# EAGLE board PLACA1_MAGO (EAGLE 9.6.2)
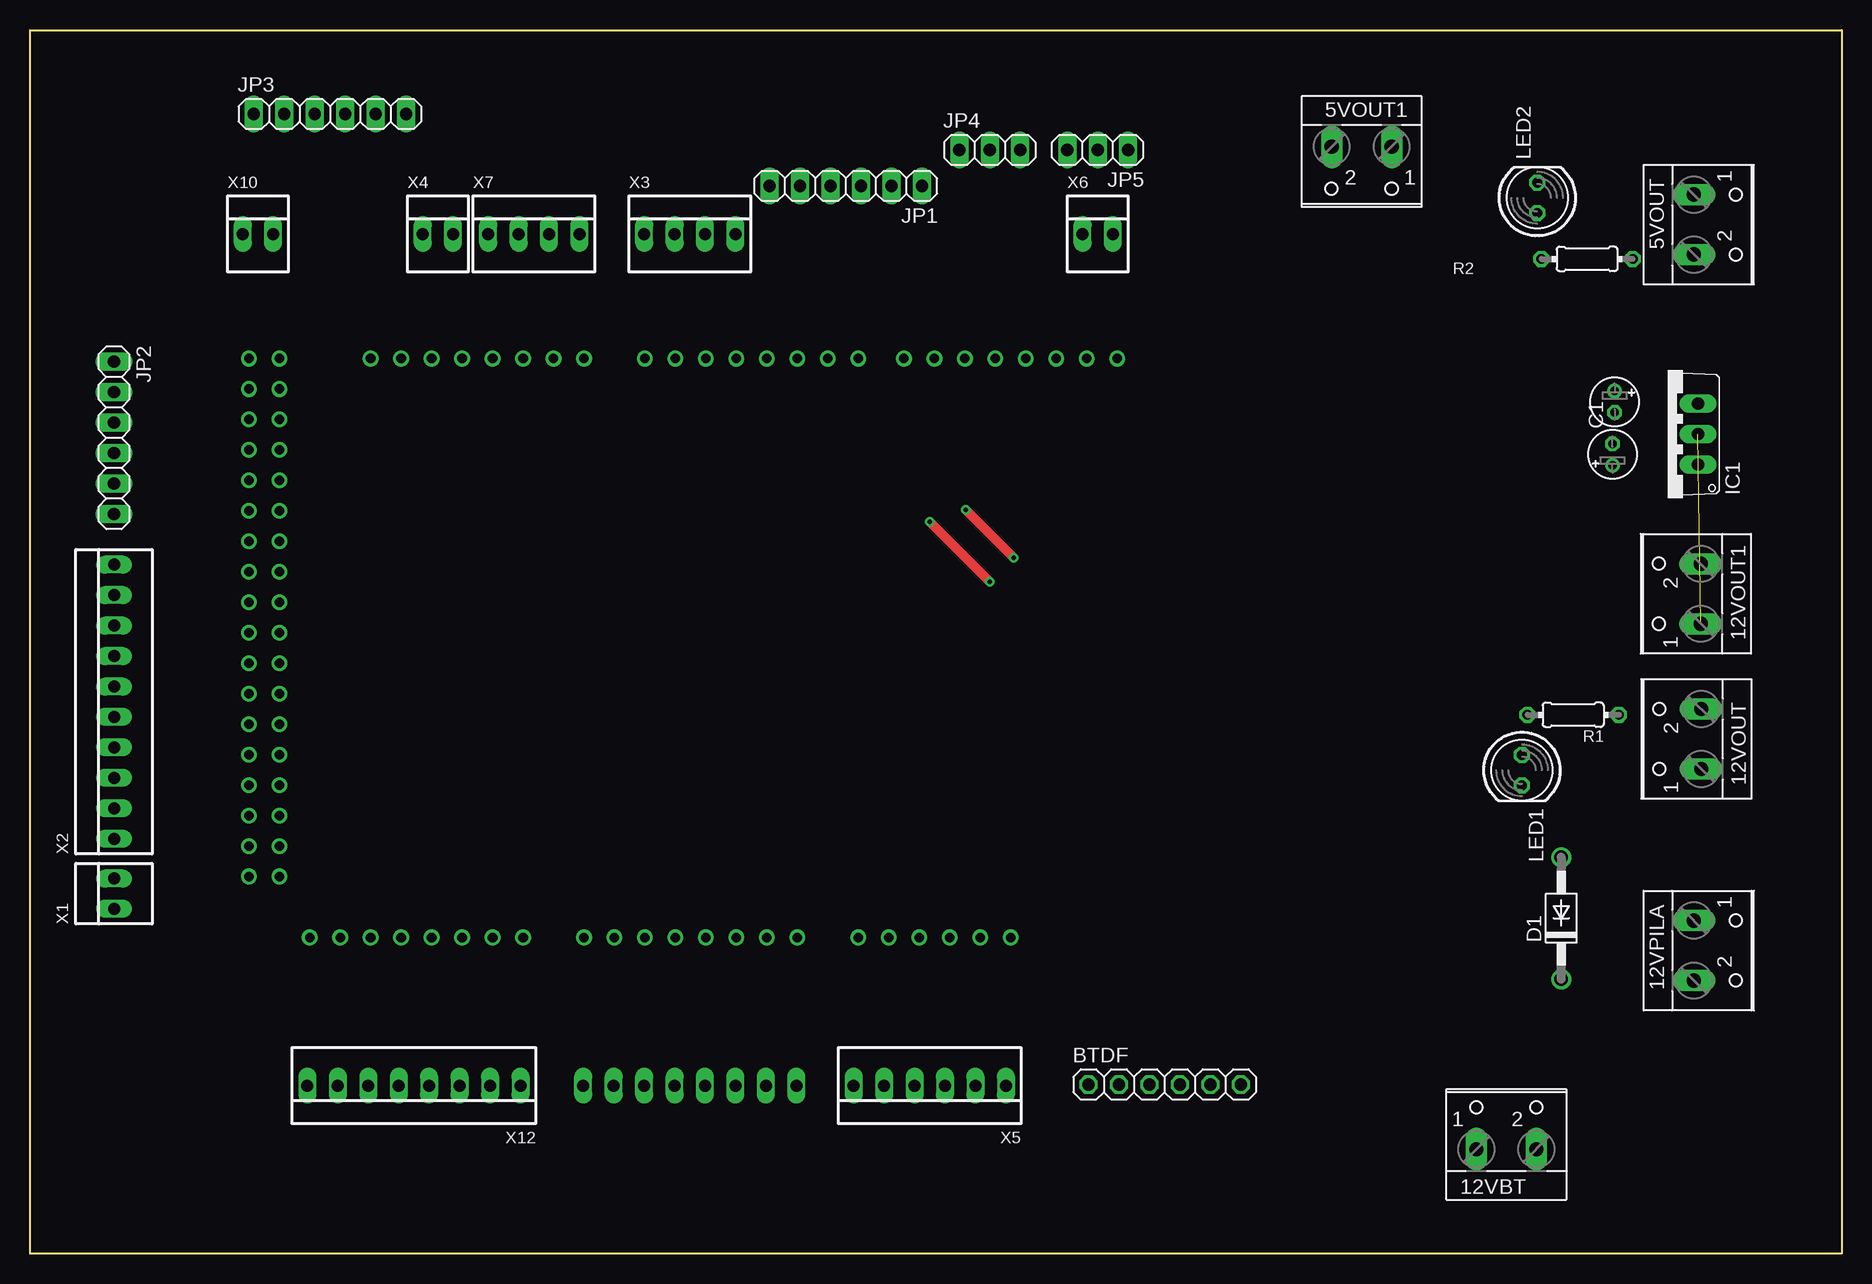
[diagram p0: board, top side]
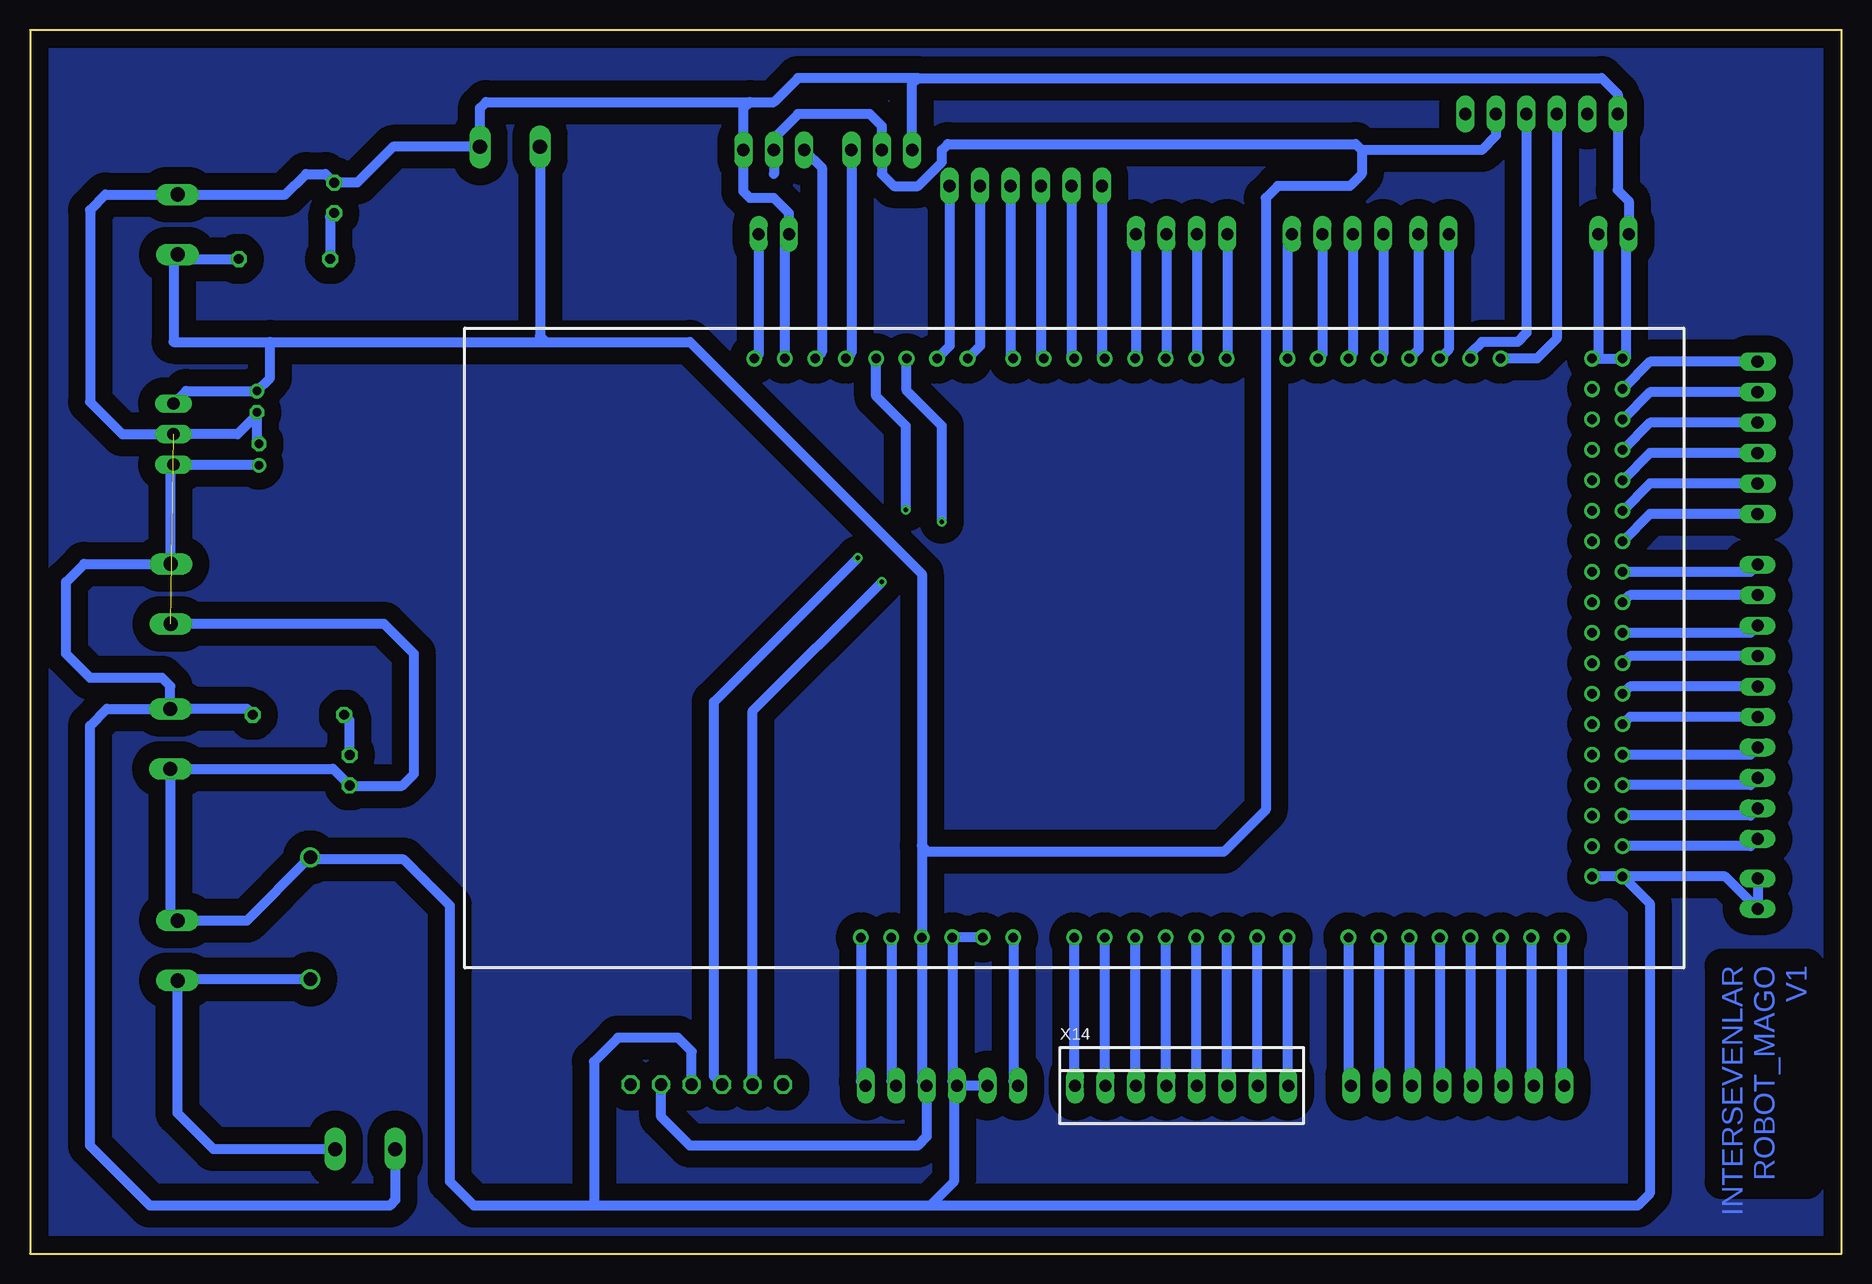
[diagram p1: board, bottom side, seen from below]

Size 151 x 102 mm. Coordinates in mm from the lower left corner, seen from the top.
Outline: 0,102 151,102 151,0 0,0 0,102
Copper layers (1*16): Top 0.035mm / dielectric 1.5mm / Bottom 0.035mm
Design rules "default": minimum track width 6mil, minimum drill 0.35mm, track to track 6mil, track to pad 6mil, pad to pad 6mil, via to via 6mil, smd to smd 6mil, copper to edge 40mil, drill to drill 6mil, minimum pad ring 10mil, minimum via ring 8mil, stop-mask expansion 4mil, vias tented up to drill 0mil, thermal gap 10mil

## Footprints (pad centres in the part's own frame; a part is rotated, then mirrored left to right if it is on the bottom)
W237-102 = drill 1.194 long: 1 -2.5,-1.27; 2 2.5,-1.27
1X06 = drill 1.016 octagon: 1 -6.35,0; 2 -3.81,0; 3 -1.27,0; 4 1.27,0; 5 3.81,0; 6 6.35,0
E1,8-4 = drill 0.711 pad 1.168: + -0.889,0 | drill 0.711 pad 1.168 octagon: - 0.889,0
DO41-10 = drill 1.118: A 5.08,0; C -5.08,0
TO220V = drill 1.016 long: 1 -2.54,-2.54; 2 0,-2.54; 3 2.54,-2.54
1X06' = drill 1.016 long: 1 -6.35,0; 2 -3.81,0; 3 -1.27,0; 4 1.27,0; 5 3.81,0; 6 6.35,0
1X03 = drill 1.016 long: 1 -2.54,0; 2 0,0; 3 2.54,0
LED5MM = drill 0.813 octagon: A -1.27,0; K 1.27,0
0204/7 = drill 0.813 octagon: 1 -3.81,0; 2 3.81,0
MEGAOUTLINE = drill 0.8: 0 12.7,24.13; 1 10.16,24.13; 2 7.62,24.13; 3 5.08,24.13; 3V3 -15.24,-24.13; 4 2.54,24.13; 5 0,24.13; 5V -12.7,-24.13; 6 -2.54,24.13; 7 -5.08,24.13; 8 -8.89,24.13; 9 -11.43,24.13; 10 -13.97,24.13; 11 -16.51,24.13; 12 -19.05,24.13; 13 -21.59,24.13; 14 17.78,24.13; 15 20.32,24.13; 16 22.86,24.13; 17 25.4,24.13; 18 27.94,24.13; 19 30.48,24.13; 20 33.02,24.13; 21 35.56,24.13; 22 43.18,21.59; 23 45.72,21.59; 24 43.18,19.05; 25 45.72,19.05; 26 43.18,16.51; 27 45.72,16.51; 28 43.18,13.97; 29 45.72,13.97; 30 43.18,11.43; 31 45.72,11.43; 32 43.18,8.89; 33 45.72,8.89; 34 43.18,6.35; 35 45.72,6.35; 36 43.18,3.81; 37 45.72,3.81; 38 43.18,1.27; 39 45.72,1.27; 40 43.18,-1.27; 41 45.72,-1.27; 42 43.18,-3.81; 43 45.72,-3.81; 44 43.18,-6.35; 45 45.72,-6.35; 46 43.18,-8.89; 47 45.72,-8.89; 48 43.18,-11.43; 49 45.72,-11.43; 50 43.18,-13.97; 51 45.72,-13.97; 52 43.18,-16.51; 53 45.72,-16.51; A0 0,-24.13; A1 2.54,-24.13; A2 5.08,-24.13; A3 7.62,-24.13; A4 10.16,-24.13; A5 12.7,-24.13; A6 15.24,-24.13; A7 17.78,-24.13; A8 22.86,-24.13; A9 25.4,-24.13; A10 27.94,-24.13; A11 30.48,-24.13; A12 33.02,-24.13; A13 35.56,-24.13; A14 38.1,-24.13; A15 40.64,-24.13; AREF -26.67,24.13; GND@1 -24.13,24.13; GND@2 -10.16,-24.13; GND@3 -7.62,-24.13; GND@4 43.18,24.13; GND@5 45.72,24.13; GND@6 43.18,-19.05; GND@7 45.72,-19.05; RESET -17.78,-24.13; VIN -5.08,-24.13
22-23-2021 = drill 1 long: 1 -1.27,0; 2 1.27,0
22-23-2101 = drill 1 long: 1 -11.43,0; 2 -8.89,0; 3 -6.35,0; 4 -3.81,0; 5 -1.27,0; 6 1.27,0; 7 3.81,0; 8 6.35,0; 9 8.89,0; 10 11.43,0
22-23-2041 = drill 1 long: 1 -3.81,0; 2 -1.27,0; 3 1.27,0; 4 3.81,0
22-23-2061 = drill 1 long: 1 -6.35,0; 2 -3.81,0; 3 -1.27,0; 4 1.27,0; 5 3.81,0; 6 6.35,0
22-23-2081 = drill 1 long: 1 -8.89,0; 2 -6.35,0; 3 -3.81,0; 4 -1.27,0; 5 1.27,0; 6 3.81,0; 7 6.35,0; 8 8.89,0

## Placement (x,y rotation side)
5VOUT  [W237-102]  139.96,85.78 270 top
5VOUT1  [W237-102]  111,91 180 top
12VBT  [W237-102]  123.06,9.96 0 top
12VOUT  [W237-102]  138.04,42.9 90 top
12VOUT1  [W237-102]  138,55 90 top
12VPILA  [W237-102]  139.96,25.26 270 top
BTDF  [1X06]  94.58,14.09 0 top
C1  [E1,8-4]  131.91,66.61 90 top
C2  [E1,8-4]  132.09,71.01 270 top
D1  1N4004  [DO41-10]  127.64,27.95 90 top
IC1  788TV  [TO220V]  136.5,68.31 90 top
JP1  [1X06']  68,89 180 top
JP2  [1X06']  7,68 270 top
JP3  [1X06']  25,95 0 top
JP4  [1X03]  80,92 0 top
JP5  [1X03]  89,92 180 top
LED1  [LED5MM]  124.36,40.29 270 top
LED2  [LED5MM]  125.64,88.01 90 top
R1  [0204/7]  128.63,44.91 180 top
R2  [0204/7]  129.79,82.91 180 top
U$1  MEGA_DEVICE  [MEGAOUTLINE]  63.96,50.48 0 bottom
X1  22-23-2021  [22-23-2021]  7,30 90 top
X2  22-23-2101  [22-23-2101]  7,46 90 top
X3  22-23-2041  [22-23-2041]  55,85 0 top
X4  22-23-2021  [22-23-2021]  34,85 0 top
X5  [22-23-2061]  75,14 180 top
X6  22-23-2021  [22-23-2021]  89,85 0 top
X7  22-23-2041  [22-23-2041]  42,85 0 top
X10  22-23-2021  [22-23-2021]  19,85 0 top
X12  22-23-2081  [22-23-2081]  32,14 180 top
X14  22-23-2081  [22-23-2081]  55,14 0 bottom

## Library data of the parts
5VOUT 5VOUT1 12VBT 12VOUT 12VOUT1 12VPILA = con-wago-500; MPN: 237-102; OC_FARNELL: unknown; OC_NEWARK: 70K9898
BTDF = adafruit
C1 C2 = rcl; SPICEPREFIX: C
D1 = diode
IC1 = linear
JP1-JP5 = pinhead
LED1 LED2 = led
R1 R2 = rcl; SPICEPREFIX: R
U$1 = ArduinoMegaOutline
X1 X4 X6 X10 = con-molex; MF: MOLEX; MPN: 22-23-2021; OC_FARNELL: 1462926; OC_NEWARK: 25C3832
X2 = con-molex; MF: MOLEX; MPN: 22-23-2101; OC_FARNELL: 1756828; OC_NEWARK: 94C0765
X3 X7 = con-molex; MF: MOLEX; MPN: 22-23-2041; OC_FARNELL: 1462920; OC_NEWARK: 38C0355
X5 = con-molex; MF: MOLEX; MPN: 22-23-2061; OC_FARNELL: 1462922; OC_NEWARK: 27C1933
X12 X14 = con-molex; MF: MOLEX; MPN: 22-23-2081; OC_FARNELL: 1756826; OC_NEWARK: 01C7592

## Nets
5V: 5VOUT1.2 5VOUT.2 BTDF.5 C2.+ IC1.3 JP3.5 JP4.2 JP5.2 R2.1 U$1.5V X5.3
12VIN: 12VBT.2 12VPILA.2 D1.C
12VON: 12VBT.1 12VOUT1.2 12VOUT.2 C1.+ IC1.1 R1.1
EN: BTDF.6
ENA: JP1.1 U$1.9
ENA2: JP2.1 U$1.23
ENB: JP1.6 U$1.4
ENB(2): JP2.6 U$1.33
GND: 5VOUT1.1 5VOUT.1 12VOUT1.1 12VOUT.1 12VPILA.1 BTDF.4 C1.- C2.- D1.A IC1.2 JP3.1 JP4.1 JP5.1 LED1.K LED2.K U$1.GND@1 U$1.GND@2 U$1.GND@3 U$1.GND@4 U$1.GND@5 U$1.GND@6 U$1.GND@7 X1.1 X1.2 X5.4 X5.5 X6.1 X10.1 X10.2
N$1: LED1.A R1.2
N$2: U$1.35 X2.10
N$3: U$1.37 X2.9
N$4: U$1.17 X7.1
N$5: LED2.A R2.2
N$6: U$1.16 X7.2
N$7: U$1.15 X7.3
N$8: U$1.14 X7.4
N$9: U$1.0 X3.1
N$10: U$1.1 X3.2
N$11: U$1.2 X3.3
N$12: U$1.3 X3.4
N$13: U$1.19 X4.1
N$14: U$1.18 X4.2
N$17: U$1.39 X2.8
N$18: JP3.2
N$19: U$1.41 X2.7
N$20: U$1.43 X2.6
N$21: U$1.45 X2.5
N$22: JP3.6
N$23: U$1.AREF X6.2
N$24: U$1.A15 X12.8
N$25: U$1.A14 X12.7
N$26: U$1.A13 X12.6
N$27: U$1.A12 X12.5
N$28: U$1.A11 X12.4
N$29: U$1.A10 X12.3
N$30: U$1.A9 X12.2
N$31: U$1.A8 X12.1
N$32: U$1.A7 X14.8
N$33: U$1.A6 X14.7
N$34: U$1.A5 X14.6
N$35: U$1.A4 X14.5
N$36: U$1.A3 X14.4
N$37: U$1.A2 X14.3
N$38: U$1.A1 X14.2
N$39: U$1.A0 X14.1
N$40: U$1.VIN X5.6
N$41: U$1.47 X2.4
N$42: U$1.49 X2.3
N$43: U$1.51 X2.2
N$44: U$1.3V3 X5.2
N$45: U$1.RESET X5.1
N$46: U$1.53 X2.1
PIN: JP5.3 U$1.13
PIN1: JP1.2 U$1.8
PIN1(2): JP2.2 U$1.25
PIN2: JP1.3 U$1.7
PIN2(2): JP2.3 U$1.27
PIN3: JP1.4 U$1.6
PIN3(2): JP2.4 U$1.29
PIN4: JP1.5 U$1.5
PIN4(2): JP2.5 U$1.31
PIN(2): JP4.3 U$1.12
RXD: BTDF.2 U$1.10
SCL: JP3.3 U$1.21
SDA: JP3.4 U$1.20
STATE: BTDF.1
TXD: BTDF.3 U$1.11

## Tracks (layer width: path | path; a pad name or v marks a point on that pad's centre or on a via)
5V
  Bottom 0.813: R2.1 138.32,82.91 5VOUT.2 139.04,82.93 139.04,76 131,76 | 131,76 108,76 | 108,76 96,76 76.66,56.66 76.66,34 | 76.66,34 U$1.5V 76.66,14.39 X5.3 76.27,9.73 77,9 96,9 98.39,11.39 BTDF.5 | 40,92 40.5,92.5 74.5,92.5 75,92 75,91 77,89 79,89 80,90 JP4.2 80,94 81,95 87,95 89,93 JP5.2 89,90 | 76.66,34 76.16,33.5 51.5,33.5 48,37 48,88 47,89 41,89 40,90 40,92 | 5VOUT1.2 108.5,76.5 108,76 | JP3.5 28.81,93.19 30,92 40,92 | IC1.3 137.99,71.9 C2.+ 131,72.99 131,76
12VIN
  Bottom 0.813: 12VBT.2 135.69,8.69 138.69,11.69 12VPILA.2 138.58,22.87 D1.C
12VON
  Bottom 0.813: 12VBT.1 120.56,4.44 121,4 141,4 146,9 146,44 144.6,45.4 12VOUT.2 | R1.1 132.93,45.4 12VOUT.2 | 139.04,45.67 12VOUT.2 | C1.+ 131.96,65.77 IC1.1 139.27,65.54 12VOUT1.2 146.5,57.5 148,56 148,50 146,48 140,48 139.31,47.31 12VOUT.2
ENA
  Bottom 0.813: JP1.1 74.35,75.65 U$1.9
ENA2
  Bottom 0.813: JP2.1 15.96,74.35 U$1.23
ENB
  Bottom 0.813: JP1.6 61.65,74.84 U$1.4
ENB(2)
  Bottom 0.813: JP2.6 15.96,61.65 U$1.33
GND  (1 unrouted)
  Bottom 0.813: 127.83,32.84 132.91,27.76 12VPILA.1 139.31,28.38 12VOUT.1 125.74,40.4 LED1.K 124.34,39 120,39 119,40 119,50 121.5,52.5 12VOUT1.1 | 127.83,32.84 D1.A | X5.4 74.12,14.39 U$1.GND@2 U$1.GND@3 | 76,4 74,6 74,13.73 X5.4 | 127.83,32.84 119.83,32.84 116,29 116,6 114,4 104,4 | 76,4 104,4 | X5.5 X5.4 | U$1.GND@7 U$1.GND@6 | U$1.GND@7 16,29.19 16,5 17,4 76,4 | U$1.GND@7 9.7,31.43 X1.1 X1.2 | 77,98 87,98 89,96 91,96 | U$1.GND@1 88.09,84.64 X6.1 87.73,86.73 89,88 91,88 91.54,88.54 JP5.1 91.54,95.46 91,96 | 91,96 113,96 113.5,95.5 5VOUT1.1 120.73,92.27 123.72,89.28 LED2.K 126.36,90 128,90 129.72,88.28 5VOUT.1 144.72,88.28 146,87 146,71 143.31,68.31 IC1.2 133.69,68.31 132.09,69.91 C2.- 132.09,67.68 C1.- | X10.2 20.27,75.12 U$1.GND@4 U$1.GND@5 18,74.61 18,84.73 X10.1 17.73,87.73 18.65,88.65 JP3.1 18.65,96.65 20,98 77,98 | JP4.1 77.46,97.54 77,98 | BTDF.4 95.85,16.85 97,18 102,18 104,16 104,4
N$1
  Bottom 0.813: LED1.A 124.36,44.45 R1.2
N$2
  Bottom 0.813: X2.10 7.6,56.83 U$1.35
N$3
  Bottom 0.813: X2.9 17.64,54.89 U$1.37
N$4
  Bottom 0.813: X7.1 38.19,74.98 U$1.17
N$5
  Bottom 0.813: LED2.A 125.98,86.4 R2.2
N$6
  Bottom 0.813: X7.2 40.73,74.98 U$1.16
N$7
  Bottom 0.813: X7.3 43.27,74.98 U$1.15
N$8
  Bottom 0.813: X7.4 46.18,84.63 U$1.14
N$9
  Bottom 0.813: X3.1 51.19,74.68 U$1.0
N$10
  Bottom 0.813: X3.2 53.73,74.68 U$1.1
N$11
  Bottom 0.813: X3.3 56.27,74.68 U$1.2
N$12
  Bottom 0.813: X3.4 58.81,74.68 U$1.3
N$13
  Bottom 0.813: X4.1 32.73,75.36 U$1.19
N$14
  Bottom 0.813: X4.2 35.27,75.36 U$1.18
N$15
  pour Bottom (isolate 1.422): 0,0 151,0 151,102 0,102
N$17
  Bottom 0.813: X2.8 7.6,51.75 U$1.39
N$19
  Bottom 0.813: X2.7 17.64,49.81 U$1.41
N$20
  Bottom 0.813: X2.6 17.64,47.27 U$1.43
N$21
  Bottom 0.813: X2.5 17.64,44.73 U$1.45
N$23
  Bottom 0.813: X6.2 90.27,74.97 U$1.AREF
N$24
  Bottom 0.813: U$1.A15 23.32,14.21 X12.8
N$25
  Bottom 0.813: U$1.A14 25.86,14.21 X12.7
N$26
  Bottom 0.813: U$1.A13 28.4,14.21 X12.6
N$27
  Bottom 0.813: U$1.A12 30.94,14.21 X12.5
N$28
  Bottom 0.813: U$1.A11 33.48,14.21 X12.4
N$29
  Bottom 0.813: U$1.A10 36.02,14.21 X12.3
N$30
  Bottom 0.813: U$1.A9 38.56,14.21 X12.2
N$31
  Bottom 0.813: U$1.A8 41.1,14.21 X12.1
N$32
  Bottom 0.813: U$1.A7 46.18,14.07 X14.8
N$33
  Bottom 0.813: U$1.A6 48.72,14.07 X14.7
N$34
  Bottom 0.813: U$1.A5 51.26,14.07 X14.6
N$35
  Bottom 0.813: U$1.A4 53.8,14.07 X14.5
N$36
  Bottom 0.813: U$1.A3 56.34,14.07 X14.4
N$37
  Bottom 0.813: U$1.A2 58.88,14.07 X14.3
N$38
  Bottom 0.813: U$1.A1 61.42,14.07 X14.2
N$39
  Bottom 0.813: U$1.A0 63.96,14.07 X14.1
N$40
  Bottom 0.813: U$1.VIN 69.04,14.39 X5.6
N$41
  Bottom 0.813: U$1.47 7.6,41.59 X2.4
N$42
  Bottom 0.813: X2.3 7.6,39.05 U$1.49
N$43
  Bottom 0.813: X2.2 7.6,36.51 U$1.51
N$44
  Bottom 0.813: U$1.3V3 79.2,14.39 X5.2
N$45
  Bottom 0.813: U$1.RESET 81.74,14.39 X5.1
N$46
  Bottom 0.813: X2.1 7.6,33.97 U$1.53
PIN
  Bottom 0.813: JP5.3 85,90.54 85,75.16 U$1.13
PIN1
  Bottom 0.813: JP1.2 71.81,75.65 U$1.8
PIN1(2)
  Bottom 0.813: JP2.2 15.96,71.81 U$1.25
PIN2
  Bottom 0.813: JP1.3 69.27,74.84 U$1.7
PIN2(2)
  Bottom 0.813: JP2.3 15.96,69.27 U$1.27
PIN3
  Bottom 0.813: JP1.4 66.73,74.84 U$1.6
PIN3(2)
  Bottom 0.813: JP2.4 15.96,66.73 U$1.29
PIN4
  Bottom 0.813: JP1.5 64.19,74.84 U$1.5
PIN4(2)
  Bottom 0.813: JP2.5 15.96,64.19 U$1.31
PIN(2)
  Bottom 0.813: JP4.3 82.54,75.08 U$1.12
RXD  (via drill 0.35)
  Top 0.813: v80,56 v75,61
  Bottom 0.813: BTDF.2 90.77,45.23 v80,56 | v75,61 75,69 77.93,71.93 U$1.10
SCL
  Bottom 0.813: JP3.3 23.73,76.27 25.39,74.61 U$1.21
SDA
  Bottom 0.813: JP3.4 26.27,76.73 27,76 30,76 30.94,75.06 U$1.20
TXD  (via drill 0.35)
  Top 0.813: v82,58 v78,62
  Bottom 0.813: BTDF.3 94,14.78 94,46 v82,58 | v78,62 78,69 80.47,71.47 U$1.11

## Text on the board
Bottom: INTERSEVENLAR / ROBOT_MAGO / V1